# Altium PCB cricket-node-hw__B.PcbDoc (part 3 of 3)
Units mil, origin at the board's own origin, x right, y up, seen from the top; angles counter-clockwise.
Board outline 2830 x 2830 mil, 4 copper layers (Top Layer, GND1, PWR/SIG, Bottom Layer), stack 61.7 mil thick; 153 components, 116 nets, 542 pads, 320 vias.
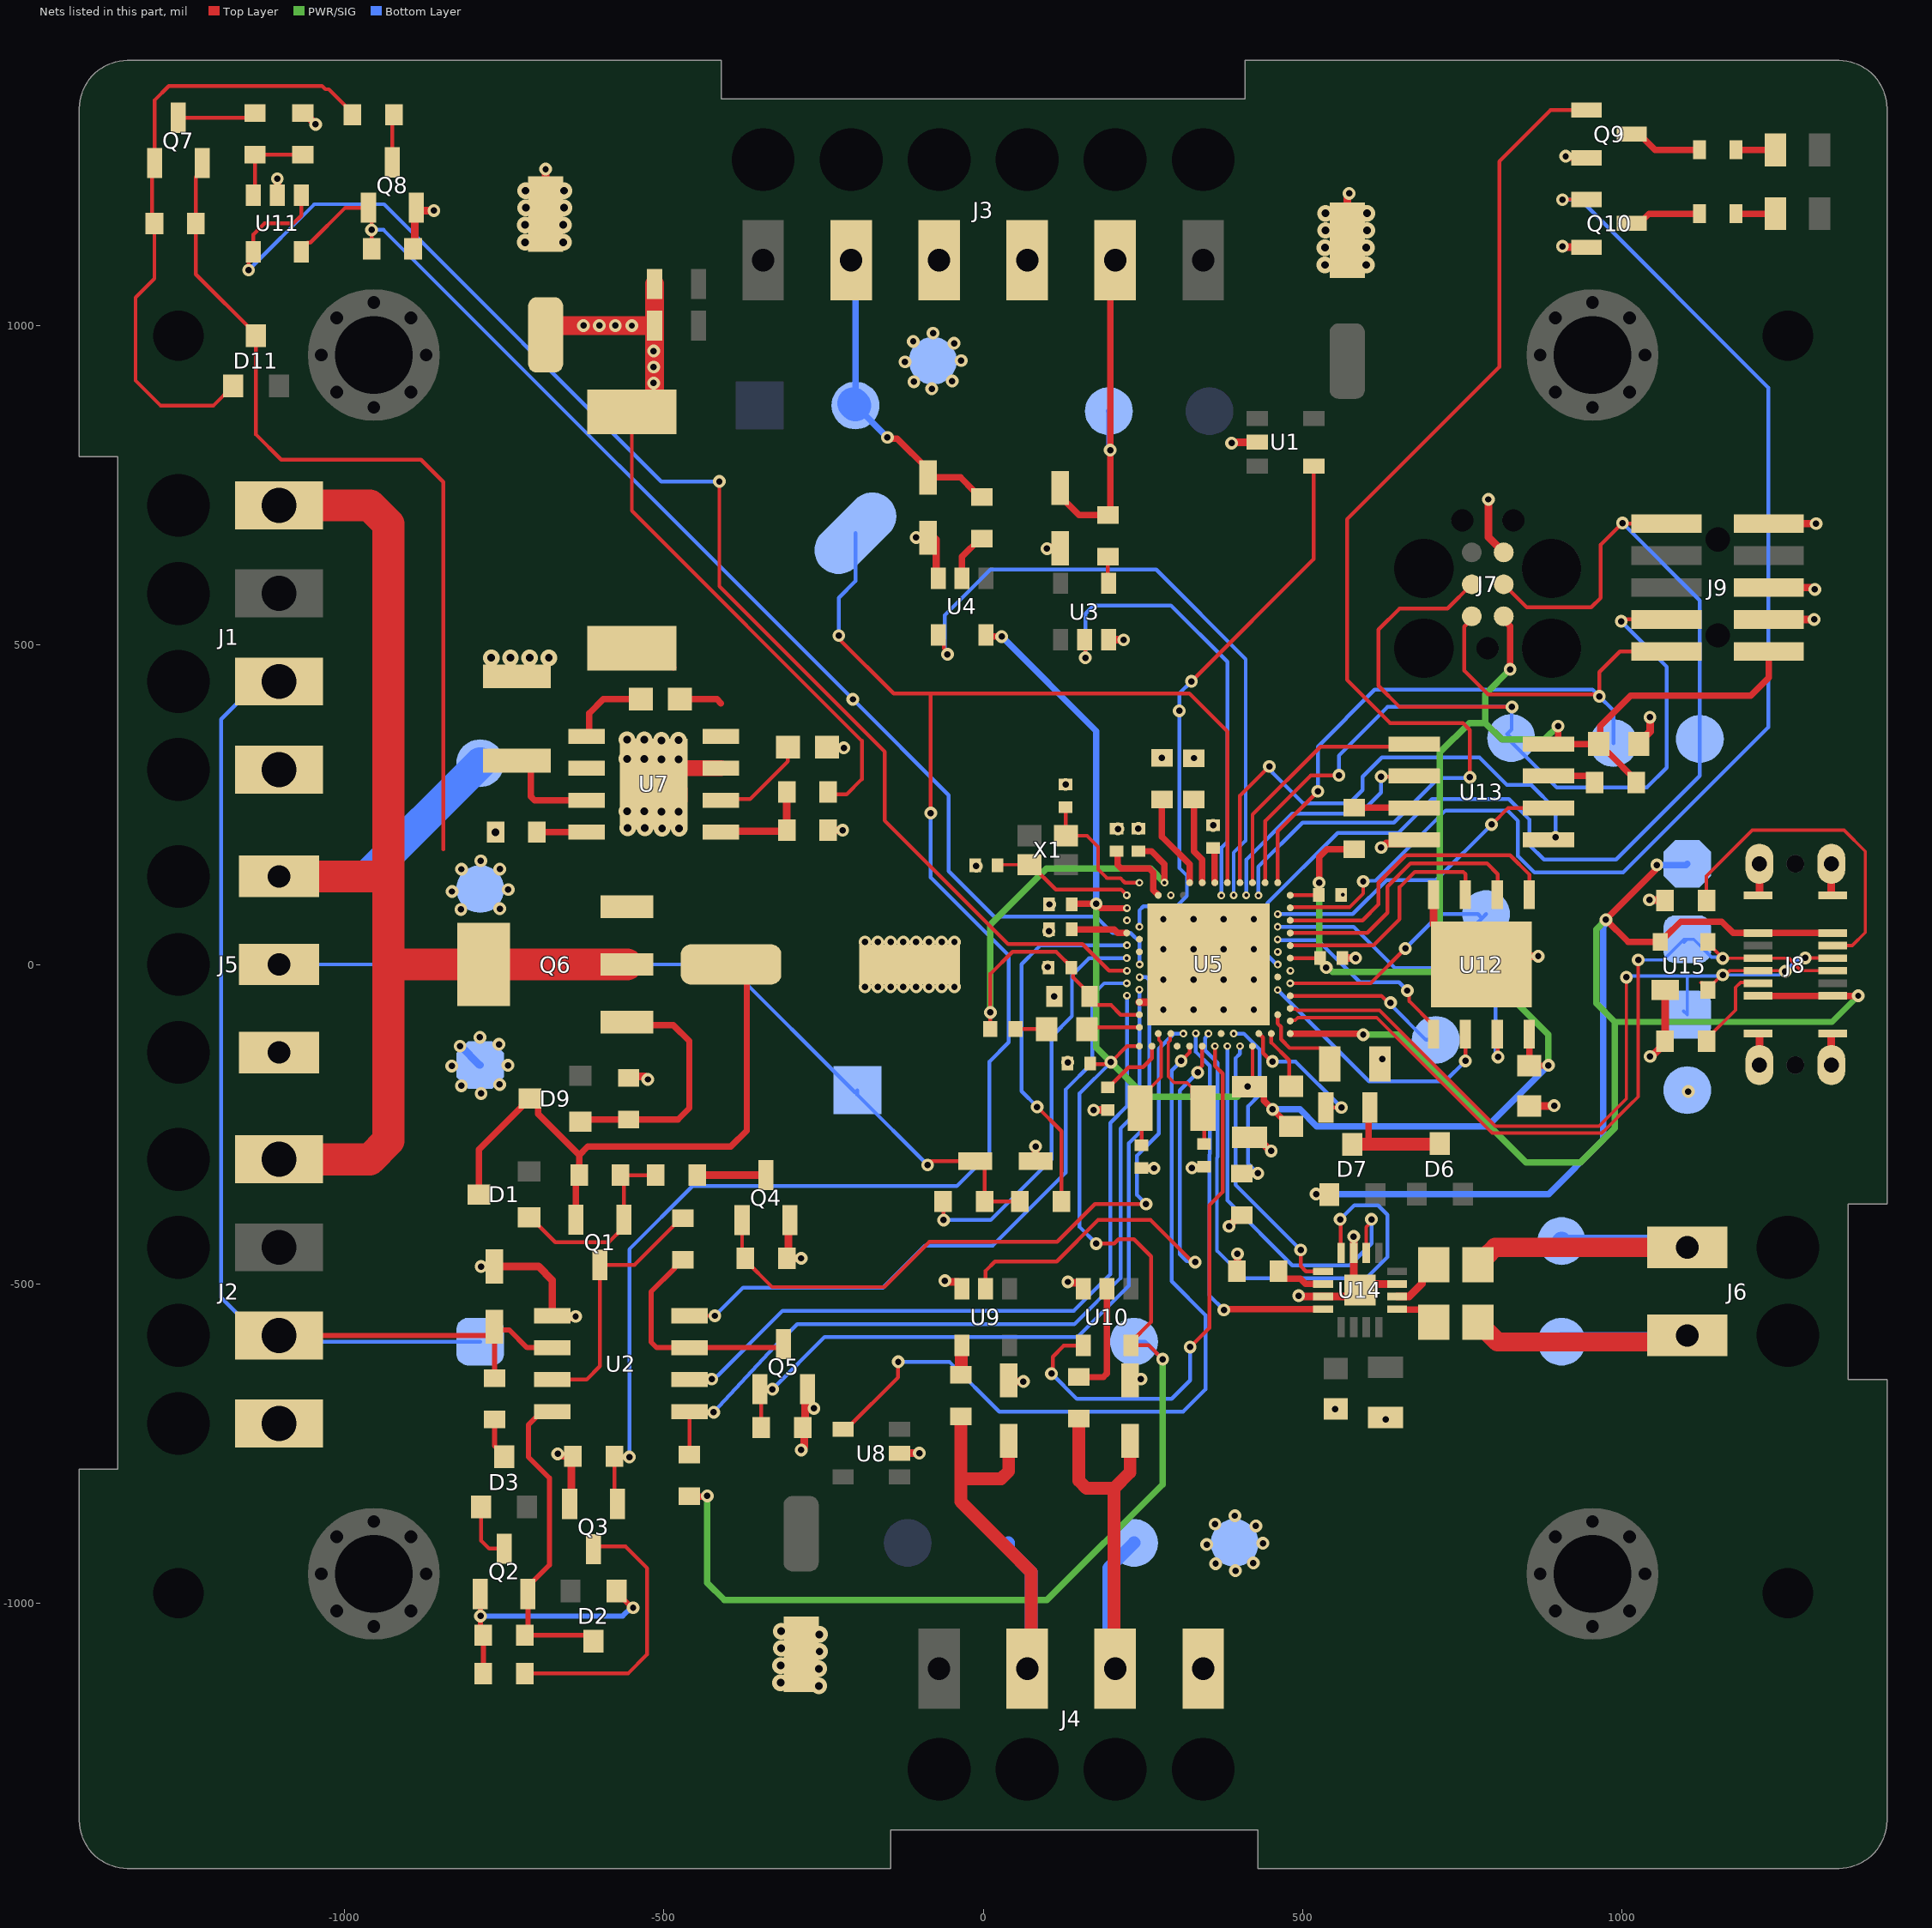
[diagram p4: the nets of this part, all layers, seen from the top]

## Via types
v1: diameter 20, hole 10, Top Layer to Bottom Layer, tented both sides, 208 vias
v2: diameter 26, hole 12, Top Layer to Bottom Layer, tented both sides, 61 vias
v3: diameter 12, hole 6, Top Layer to Bottom Layer, tented both sides, 35 vias
v4: diameter 19.68, hole 9.84, Top Layer to Bottom Layer, tented both sides, 16 vias

## Nets (pads, with @x,y where several pads share a name; then routed paths per layer and width w, separated by ;. In a path a pad name is that pad's centre, name@x,y a point inside that pad or via, vN(x,y) a via of type N, cw(c..) or ccw(c..) an arc to the next point about the centre after c; other vN are vias at no path point) (continued)
+VBUS: D7.1 J8.A4 J8.A9 J8.B4 J8.B9 TP1.1 U5.AD2 U15.4 | length 2923.4
  Top Layer w10: U5.AD2@480.79,-108.27 593.27,-108.27 v1(595,-110) ; v1(521.37,-359.37) 540.98,-359.37 D7.1@541.98,-360.37 ; v1(1054.74,155.74) 1052.83,153.83 1052.83,147.83 v1(975,70) 1010,35 U15.4@1060,35 1060,36.97 1066.81,43.78 1068.78,43.78 1092,67 1156.38,67 1174.17,49.21 J8.A9@1213.19,49.21 J8.B4@1330.12,49.21 ; J8.A4@1213.19,-49.21 J8.B9@1330.12,-49.21 1365.79,-49.21 1366,-49 v1(1370,-49)
  PWR/SIG w10: v1(595,-110) 650,-110 850,-310 935,-310 988.96,-256.04 988.96,-90 ; v1(975,70) 960,55 960,-61.04 988.96,-90 ; v1(1370,-49) 1329,-90 988.96,-90
  Bottom Layer w10: v1(521.37,-359.37) 885.63,-359.37 971,-274 971,59.14 973.09,61.23 973.09,68.09 v1(975,70) ; v1(1054.74,155.74) 1100.62,155.74 TP1.1@1102.36,157.48
+VIN: J1.1 J2.1 J5.1 Q6.2 Q6.4 TP27.1 | length 2242.3
  Top Layer w50: J2.1@-1102.36,-305.12 -960.29,-305.12 -931,-275.83 -931,137 ; J5.1@-1102.36,137.8 -931.8,137.8 -931,137 ; J1.1@-1102.36,718.5 -960.29,718.5 -931,689.21 -931,137 ; -908,0 Q6.4@-782.2,0 Q6.2@-557.8,0
  Bottom Layer w50: J5.1@-1102.36,137.8 -964.57,137.8 TP27.1@-787.4,314.96
+VIN-PROTECT: C7.1 C8.1 D1.3 D9.3 D11.3 Q1.2 Q6.3 Q7.2 R1.2 R24.2 TP5.1 U7.2 U7.3 | length 2515.8
  Top Layer w6: R24.2@-1243.3,1146.27 R24.2@-1232.52,1157.05 ; Q7.2@-1222.6,1254.57 -1222.6,1242.76 -1232.52,1232.83 R24.2@-1232.52,1160 R24.2@-1232.52,1157.05 ; -845,180 -845,755 -880,790 -1099,790 -1138.39,829.39 D11.3@-1138.39,984.25 -1138.39,986.22 -1232.52,1080.35 R24.2@-1232.52,1157.05
  Top Layer w10: D1.3@-789.37,-360 -789.37,-290 -722.09,-222.72 -722.09,-220.75 -711.34,-210 D9.3@-709.37,-210 -707.4,-210 -696.65,-220.75 -696.65,-234.09 -632.48,-298.27 ; C8.1@-730,319.06 -722.05,319.06 -708.35,305.35 -708.35,262.98 -702.49,257.13 U7.3@-621.04,257.13 ; Q1.2@-637.4,-399.57 -637.4,-319.06 R1.2@-632.48,-314.13 ; R1.2@-632.48,-330 R1.2@-632.48,-314.13 ; C7.1@-395,0.24 C7.1@-394.76,0 -370,-24.76 -370,-260 -395,-285 -619.21,-285 -632.48,-298.27 ; R1.2@-632.48,-314.13 -632.48,-298.27
  other v1: -817.61,86.19 -756.61,87.19 -831.61,114.19 -743.61,117.19 -816.81,149.1 -756.61,149.19 -786.61,162.19
AUX1: U5.N1 U10.4 | length 876.9
  Top Layer w6: v1(107,-640.5) 109,-638.5 109,-614 126,-597 155.64,-597 U10.4@156.54,-596.1 ; v1(324,-599) 354,-569 354,-377 375,-356 375,-171 362.68,-158.68 v3(362.68,-127.95)
  Bottom Layer w6: v1(107,-640.5) 146.5,-680 295,-680 324,-651 v1(324,-599)
AUX1-EXT: D13.2 J4.3 R30.2 TP11.1 | length 761.9
  Top Layer w20: R30.2@150,-710.98 150,-808.28 161.72,-820 205,-820 ; J4.3@205,-1122.82 205,-820 ; D13.2@230,-745.75 230,-795 205,-820
  Bottom Layer w20: J4.3@206.69,-1102.36 196.85,-1092.52 196.85,-944.73 236.07,-905.51 TP11.1@236.22,-905.51
BOARD-ID0: R21.2 U5.L24 | length 124.9
  Top Layer w10: R21.2@330,247.52 330,177.04 342.99,164.05 U5.L24@342.99,127.95
BOARD-ID1: R20.2 U5.J24 | length 137.5
  Top Layer w10: R20.2@280,247.52 280,200 323.31,156.69 U5.J24@323.31,127.95
BOARD-ID2: R19.2 U5.T2 | length 283.9
  Top Layer w6: R19.2@405,-327.52 405.52,-327 v1(430,-327)
  Bottom Layer w6: v3(392.2,-108.27) 408.27,-108.27 433,-133 433,-204 415,-222 415,-312 v1(430,-327)
BTN0: U4.4 U5.T23 | length 1039.4
  Top Layer w6: U4.4@-70.42,516.02 -61.6,507.21 -61.6,494.71 -56,489.1 v1(-56,485.31)
  Bottom Layer w6: v1@-60,480 -60,546.67 11.33,618 271,618 411,478 411,194 392.2,175.2 v3(392.2,108.27)
BTN0-EXT: D8.2 J3.5 R12.2 TP7.1 | length 514.4
  Top Layer w10: v1(-150,825) -148.09,823.09 -134.59,823.09 -86.57,775.07 D8.2@-86.57,762.28 ; D8.2@-86.57,749.48 D8.2@-86.57,762.28 ; R12.2@-5.01,731.76 -5.01,732.05 -13.5,740.54 -13.79,740.54 -35.52,762.28 D8.2@-86.57,762.28
  Bottom Layer w10: J3.5@-206.69,1102.36 -200,1095.67 TP7.1@-200,875 v1(-150,825)
  Bottom Layer w50: J3.5@-206.69,1102.36 J3.5@-203.35,1099.02 ; TP7.1@-203.35,878.35 TP7.1@-200,875
CC1: J8.A5 R37.2 | length 141.9
  Top Layer w5.14: R37.2@1132.48,-120 1132.48,-117.05 1178,-71.53 1178,-36 1185.85,-28.15 1211.81,-28.15 J8.A5@1213.19,-29.53
CC2: J8.B5 R36.2 | length 523.7
  Top Layer w5.14: R36.2@1137.48,95 R36.2@1132.48,100 1132.48,138.48 1204,210 1348,210 1380.99,177.01 1380.99,49.99 1360.53,29.53 J8.B5@1330.12,29.53
CHG-DET: R32.1 U5.A16 | length 575.8
  Top Layer w6: v1(84.5,-223) 122.48,-260.98 R32.1@122.48,-371 R32.1@123,-371.52
  Top Layer w10: U5.A16@224.88,29.53 224.88,29.88 v3(225,30)
  Bottom Layer w6: v1(84.5,-223) 60,-198.5 60,0.35 84.5,24.85 87.07,27.43 89.65,30 v3(225,30)
CHG-DET-PWR: R31.2 U5.A14 | length 635.8
  Top Layer w6: R31.2@-62.48,-371 -62,-371.48 v1(-62,-400)
  Bottom Layer w6: v1(-62,-400) 12,-400 107,-305 107,-113 139,-81 139,-17 165.84,9.84 v3(224.88,9.84)
CHG-LOOP: D14.2 J5.2 R31.1 R32.2 TP16.1 | length 1453.4
  Top Layer w6: v1(-87,-314) -87,-311.51 -83.49,-308 D14.2@-12.24,-308 -8.3,-308 2.48,-318.78 R31.1@2.48,-371 R32.2@57.52,-371
  Bottom Layer w6: TP16.1@-200.5,-200.5 -401,0 J5.2@-1072.36,0 ; TP16.1@-196.85,-196.85 -196.85,-204.15 v1(-87,-314) ; J5.2@-1072.36,0 J5.2@-1102.36,0 -1077.36,-25 -1047.36,-25 J5.2@-1072.36,0
FRAM-CLK: U5.AC21 U13.6 | length 493.1
  Top Layer w6: v1(796,219) 822,245 U13.6@885.32,245
  Bottom Layer w5.98: v3(461.1,78.74) 578.72,78.74 631.9,131.92 708.92,131.92 v1(796,219)
FRAM-CS: U5.W24 U13.1 | length 405.4
  Top Layer w6: U5.W24@421.73,127.95 421.73,234.73 528,341 670.69,341 U13.1@674.69,345
FRAM-SDI: U5.U24 U13.5 | length 795.6
  Top Layer w6: U5.U24@402.05,127.95 402.05,264.05 v1(448,310)
  Bottom Layer w6: v1(448,310) 448,306.21 452.94,301.28 452.94,300.06 501,252 573,252 594,273 594,293.87 624.13,324 777,324 820,281 858,281 896,243 v1(896,199)
FRAM-SDO: U5.V23 U13.2 | length 387.4
  Top Layer w6: v1(623,294) 673.69,294 U13.2@674.69,295
  Bottom Layer w6: v3(411.89,108.27) 411.89,163.89 484,236 590,236 623,269 v1(623,294)
GND: C1.1 C2.1 C3.1 C4.1 C6.1 C7.2 C8.2 C9.1 C10.1 C11.1 C12.2 C13.2 C14.2 C15.1 C16.1 C17.1 C18.1 C19.1 C20.1 C21.2 C22.2 C23.1 C24.1 C25.1 C26.1 C27.1 C28.1 D4.1 D5.1 D8.1 D12.1 D13.1 D14.1 J1.4 J2.4 J3.3 J3.4 J4.4 J5.3 J7.5 J8.A1 J8.A12 J8.B1 J8.B12 J8.S1 J8.S2 J8.S3 J8.S4 J9.3 J9.5 J9.9 pad.G1@1259.84,-984.25 pad.G1@-1259.84,-984.25 Q3.2 Q4.2 Q5.2 Q8.2 Q9.2 Q10.2 R5.1 R6.1 R10.1 R18.2 R19.1 R20.1 R21.1 R22.2 R23.2 R28.2 R29.1 R33.2 R36.1 R37.1 TP2.1 TP24.1 TP25.1 TP26.1 U1.2 U2.5 U3.3 U4.3 U5.74 U5.B7 U5.F23 U7.7 U7.9 U8.2 U9.3 U10.3 U11.2 U12.4 U12.9 U13.4 U14.3 U14.11 U14.15 U14.17 U15.1 | length 3596.9
  Top Layer w10: v2(-557.63,239.83) -557.63,240.22 U7.9@-527.63,270.22 ; v2(-557.63,351.83) -557.63,294.33 -542.33,279.02 -542.33,251.52 v2(-530.63,239.83) -530.63,267.22 U7.9@-527.63,270.22 ; v2(-556.63,213.83) U7.9@-556.63,239.83 ; v2(-530.63,321.83) -527.63,318.83 U7.9@-527.63,314.51 ; U7.9@-530.63,323.46 v2(-530.63,351.83) ; U7.9@-527.63,282.13 U7.9@-527.63,270.22 ; U7.9@-515.72,282.13 U7.9@-527.63,270.22 ; v2(-503.63,238.83) U7.9@-503.63,272.17 ; v2(-503.63,320.83) -500.63,317.83 U7.9@-500.63,307.13 ; U7.9@-503.63,322.46 v2(-503.63,350.83) ; U7.9@-477.04,307.13 v2(-477,321) v2(-477,321) ; U7.9@-477,322.63 v2(-477,351)
  Top Layer w12: U11.2@-1105,1204.29 v1(-1105,1230) ; R28.2@-1065,1332.48 -1062.05,1332.48 -1045,1315.43 v1(-1045,1315) ; R29.1@-892.52,1120 -890.06,1122.46 Q8.2@-890.06,1182.11 ; Q8.2@-887.6,1184.57 Q8.2@-890.06,1182.11 ; v1(-860,1180) -887.95,1180 Q8.2@-890.06,1182.11 ; v1(-786,-473) -785.76,-472.76 D4.1@-765,-472.76 -696.24,-472.76 -674.57,-494.43 U2.5@-674.57,-550 -671.57,-553 -640,-553 v1(-638,-551) ; C14.2@-685,1174.49 v1(-685,1245) ; v1(-666,-766) -663,-769 -643.48,-769 R5.1@-642.48,-770 -644.94,-772.46 -644.94,-842.11 Q3.2@-647.4,-844.57 ; R18.2@-555,-177.52 -552.48,-175 -530,-175 v1(-525,-180) ; Q4.2@-302.6,-400.43 -305.06,-402.89 -305.06,-457.54 R6.1@-307.52,-460 v1(-285,-460) ; C13.2@-285,-1080 C13.2@-280,-1085 ; v1(-285,-760) -280,-755 -280,-727.52 R10.1@-282.52,-725 ; R10.1@-278.76,-721.24 -278.76,-695 ; Q5.2@-278.76,-668.76 -278.76,-695 ; Q5.2@-278,-675.48 Q5.2@-273.76,-671.24 ; v1(-265,-695) -278.76,-695 ; R23.2@-240,212.52 R23.2@-242.52,210 v1(-220,210) ; C15.1@-235.94,338 -234.44,339.5 -218.5,339.5 v1(-218,339) ; U8.2@-130.71,-765 v1(-100,-765) ; v1(-105.01,668.31) -104.49,667.79 -76.57,667.79 -73.49,664.71 -73.49,607.68 U4.3@-70.42,604.61 ; v1(-60,-495.13) -57.84,-495.13 -56.18,-496.79 -39.28,-496.79 -33.46,-502.6 U9.3@-33.46,-507.52 ; C21.2@-12.72,155 -12,155 v1(-11,154) ; D12.1@40,-651.26 41.74,-653 v1(63,-653) ; v1(82,-285) 82,-307.76 D14.1@82.24,-308 ; v1(100,651) 102,653 118.94,653 D5.1@120.53,651.41 ; v1(101,-4) 101.28,-4 C10.1@102.28,-5 ; v1(103,52) 103,54.72 C18.1@103.28,55 ; v1(104,94) 104,94.72 C2.1@104.28,95 ; C1.1@132.28,-155 132.5,-154.78 v1(132.5,-153.21) ; v1(132.64,-496.94) 134.17,-498.47 150.72,-498.47 156.54,-504.28 U10.3@156.54,-507.52 ; v1(173,-228) 173.14,-227.86 194.86,-227.86 C17.1@195,-227.72 ; U3.3@196.28,508.14 219.86,508.14 v1(220,508) ; C19.1@209,212.72 209.72,212 v1(211,212) ; D13.1@230,-651.26 232.17,-649.09 v1(247.04,-649.09) ; U5.B7@244.57,-59.06 270.16,-59.06 v4(281.97,-70.87) ; C23.1@248,-318.72 248.14,-318.86 267.36,-318.86 v1(267.5,-319) ; v1(327,-318.47) 327.88,-317.6 345.12,-317.6 C24.1@346,-316.72 ; v1(385,-410) 385,-409.53 402.05,-392.48 R19.1@405,-392.48 ; v1(389,816) 390.4,817.4 U1.2@429,817.4 ; R33.2@397.52,-480 398,-479.52 v1(398,-453) ; C6.1@417,-270.37 427.83,-270.37 449.46,-292 v1(451,-292) ; v1(494,-518.53) 495.47,-520 507,-520 507.06,-519.94 531.83,-519.94 U14.3@531.93,-519.84 580.16,-519.84 U14.17@590,-510 ; v1(551,-696) 551.5,-696 C26.1@552,-695.5 ; C3.1@560.72,109 v3(563,109) ; C4.1@562.72,10 v1(583,10) ; C12.2@570,1133.49 570,1204 v1(573,1207) ; v1(580,-426) 580,-426.77 580.06,-426.83 580.06,-451.83 U14.15@580.16,-451.93 580.16,-500.16 U14.17@590,-510 ; C20.1@621.37,-156 621.37,-151.63 v1(625,-148) ; v1(623,183) 625.16,183 631.35,189.19 668.87,189.19 U13.4@674.69,195 ; v1(630,-712) C27.1@630,-709.37 ; U14.11@648.07,-500.16 599.84,-500.16 U14.17@590,-510 ; U12.4@705,109.06 705,63.19 768.19,0 U12.9@780,0 793,13 v1(869,13) ; v1(791,728) 791,669 J7.5@815,645 ; C25.1@855,-221.5 893.5,-221.5 v1(894,-221) ; v1(907,1124) 908.4,1122.6 Q10.2@944.57,1122.6 ; v1(912,1265) 913,1265 914,1264 943.17,1264 Q9.2@944.57,1262.6 ; C28.1@1026.5,345 1026.5,346.97 1044,364.47 v1(1044,387) ; v1(1043,101) 1066.52,101 R36.1@1067.52,100 ; v1(1044.14,-144) 1046.47,-144 1067.52,-122.95 R37.1@1067.52,-120 1067.52,-40.16 U15.1@1067.87,-39.8 ; J8.A1@1213.19,-108.27 1215.26,-108.27 1215.35,-108.36 J8.S1@1215.35,-157.48 ; J8.A12@1213.19,108.27 1215.26,108.27 1215.35,108.36 J8.S2@1215.35,157.48 ; J9.3@1230,540 v1(1301,540) ; J9.5@1230,590 1299,590 v1(1302,587) ; J9.9@1230,690 v1(1304,690) ; J8.S3@1327.95,-157.48 1327.95,-108.36 1328.05,-108.27 J8.B12@1330.12,-108.27 ; J8.S4@1327.95,157.48 1327.95,108.36 1328.05,108.27 J8.B1@1330.12,108.27
  Top Layer w25: U7.9@-515.72,314.51 U7.9@-515.72,282.13 ; v2(-503.63,238.83) -485.8,256.65 U7.9@-475.8,256.65 ; U7.9@-501.52,294.25 U7.9@-495.84,286.16 ; U7.9@-488.14,275.17 -482.14,281.16 -475.41,274.43 -475.41,257.05 U7.9@-475.8,256.65 ; U7.9@-488.14,282.13 U7.9@-515.72,282.13 ; U7.9@-488.14,291.99 U7.9@-475.07,305.06 ; v2(-477,239) -475.8,240.2 U7.9@-475.8,256.65 ; U7.7@-410.41,307.13 -490.72,307.13 U7.9@-515.72,282.13
  Bottom Layer w12: v1(-819,-128) -817.94,-128 -788.46,-157.48 TP2.1@-787.4,-157.48 ; TP24.1@1102.36,-196.85 1104,-198.49 v1(1104,-199)
  other v1: 395,-949 364,-938 423,-937 350,-908 438,-906 427,-879 363,-876 394,-863 -786,-202 -817,-190 -757,-188 -832,-159 -744,-158 -758,-125 -788,-114 111.44,-50 -185,-35 -165,-35 -145,-35 -125,-35 -105,-35 -85,-35 -65,-35 -45,-35 -185,35 -165,35 -145,35 -125,35 -105,35 -85,35 -65,35 -45,35 243,212.72 360,217.72 129,281.72 280,323.48 330,323 -80.48,901.18 -108.48,912.18 -48.48,913.18 -122.48,943.18 -34.48,945.18 -45.48,972.18 -109.48,975.18 -78.48,988.18
  other v2: -257.18,-1129.48 -317.18,-1124.48 -257.18,-1102.48 -317.18,-1097.48 -256.18,-1075.48 -316.18,-1070.48 -256.35,-1048.85 -316.35,-1043.85 -763.52,207.13 -502.63,212.83 -476,213 -529.63,213.83 -557.63,321.83 -770,480 -740,480 -710,480 -680,480 535,1095 600,1095 535,1122 600,1122 -717.18,1130.52 -657.18,1130.52 536,1149 601,1149 -717.18,1157.52 -657.18,1157.52 535.83,1175.63 600.83,1175.63 -716.18,1184.52 -656.18,1184.52 -716.35,1211.15 -656.35,1211.15
  other v3: 293.78,108.27
  other v4: 329.21,-70.87 376.46,-70.87 423.7,-70.87 281.97,-23.62 329.21,-23.62 376.46,-23.62 423.7,-23.62 281.97,23.62 329.21,23.62 376.46,23.62 423.7,23.62 281.97,70.87 329.21,70.87 376.46,70.87 423.7,70.87
GREEN-LED: Q10.1 U5.AD22 | length 2002.5
  Top Layer w6: U5.AD22@480.79,88.58 481.57,89.37 573.5,89.37 595,110.87 v1(595,130) ; v1(907,1197) 911,1197 911.4,1197.4 Q10.1@944.57,1197.4
  Bottom Layer w6: v1(595,130) 595.98,130.98 614,130.98 724.02,241 821,241 837.35,224.65 837.35,169.65 863,144 1002,144 1229,371 1229,903 935,1197 v1(907,1197)
LIN-CMDR: Q3.1 R5.2 TP9.1 U5.R24 | length 2917.2
  Top Layer w6: Q3.1@-572.6,-844.57 -577.52,-839.65 R5.2@-577.52,-770 -555,-770 v1(-554,-771) ; v1@-225,513.71 v1(-226,514.71) -226,509.79 -140.21,424 -82,424 ; v1(-82,237) -82,424 ; U5.R24@382.36,127.95 382.36,364.64 323,424 -82,424
  Bottom Layer w6: v1(-554,-771) -554,-446 -455,-347 -41,-347 10,-296 10,-152 40,-122 40,14 -82,136 v1(-82,237) ; v1(-226,514.71) -226,574 -200,600 TP9.1@-200,675
LIN-IO: D4.2 J1.3 J2.3 R7.2 TP13.1 U2.6 | length 1980.2
  Top Layer w8: J2.3@-1102.36,-580.71 -774.78,-580.71 D4.2@-765,-570.93 ; R7.2@-765,-647.52 D4.2@-765,-570.93 ; U2.6@-674.57,-600 -714,-600 -742,-572 -760.24,-572 D4.2@-765,-567.24 D4.2@-765,-570.93
  Bottom Layer w6: J1.3@-1102.36,442.91 -1133.76,442.91 -1193,383.67 -1193,-521.47 -1133.76,-580.71 J2.3@-1102.36,-580.71 -1092.52,-590.55 TP13.1@-787.4,-590.55
LIN-PWR: Q4.1 R6.2 U5.H2 | length 1074.5
  Top Layer w6: Q4.1@-377.4,-400.43 -377.4,-455.08 R6.2@-372.48,-460 -372.48,-462.95 -330.43,-505 -155,-505 -84,-434 116,-434 175,-375 v1(255,-375)
  Bottom Layer w6: v1(255,-375) 241,-361 241,-299 275,-265 275,-131.97 298.71,-108.27 v3(313.46,-108.27)
LIN-RX-OUT: R11.2 U2.1 U5.B9 | length 1296
  Top Layer w6: R11.2@-460,-767.52 U2.1@-460,-700 -459,-701 v1(-422,-701)
  Bottom Layer w6: v1(-422,-701) -327.38,-599.06 -323.78,-595.45 -320.85,-592.52 -291.33,-563 143,-563 215,-491 215,-257 244.57,-227.43 v3(244.57,-39.37)
LIN-SLP-N: U2.2 U5.A8 | length 1174.4
  Top Layer w6: U2.2@-460,-650 -459,-649 v1(-425,-649) ; U5.A8@224.88,-49.21 225,-49.09 v3(225,-49)
  Bottom Layer w6: v1(-425,-649) -421.21,-649 -415.78,-643.57 -415.57,-643.57 -314,-542 142,-542 199,-485 199,-248 225,-222 v3(225,-49)
LIN-TX-IN: U2.4 U5.A10 | length 1038.7
  Top Layer w6: U2.4@-460,-550 v1(-420,-550)
  Bottom Layer w6: v1(-420,-550) -376,-506 -157,-506 -91,-440 15,-440 129,-326 129,-196 171,-154 171,-48 189.47,-29.53 v3(224.88,-29.53)
LIN-WAKE: Q5.1 R10.2 U5.B11 | length 1215
  Top Layer w6: R10.2@-347.48,-725 -347.48,-667.32 Q5.1@-349.8,-665 v1(-330,-665) ; U5.B11@244.57,-19.69 244.68,-19.69 v3(245,-20)
  Bottom Layer w6: v1(-330,-665) -248,-583 148,-583 228,-503 228,-280 260,-248 260,-24.51 255.49,-20 v3(245,-20)
NetC5_1: C5.1 L4.1 U7.8 | length 151.8
  Top Layer w10: L4.1@-550,494.96 -514.96,494.96 L4.1@-484.92,464.92 ; C5.1@-475.02,415.13 -416.77,415.13 -410.41,408.77
  Top Layer w25: L4.1@-550,494.96 L4.1@-545.04,490
NetC5_2: C5.2 U7.1 | length 127.7
  Top Layer w10: U7.1@-621.04,357.13 -617.09,361.08 -617.09,392.91 -594.87,415.13 C5.2@-536.04,415.13
NetC9_2: C9.2 C10.2 C11.2 L2.1 U5.B5 U5.E24 | length 925.5
  Top Layer w6: L2.1@11.34,-101.18 v1(11.34,-75) 11.34,-14.66 46,20 114.29,20 140.7,-6.41 140.7,-20.2 162.56,-42.06 162.56,-53.94 172.35,-63.73 200.3,-63.73 215.31,-78.74 U5.B5@244.57,-78.74
  Top Layer w10: C9.2@243,177.28 263.72,177.28 283.94,157.06 283.94,128.06 v3(284,128) v3(284,128)
  PWR/SIG w10: v1(11.34,-75) 11.34,62.34 98.96,149.96 262.04,149.96 v3(284,128)
  Bottom Layer w6: v3@282.85,129.15 v3(284,128)
NetC14_1: C14.1 L4.2 R15.1 R16.1 R17.2 | length 1189.7
  Top Layer w6: L4.2@-550,865.04 -550,710 -190,350 -190,290 -214,266 -238.52,266 R17.2@-242.52,270
  Top Layer w30: C14.1@-685,985.51 -685,987.44 -672.44,1000 v1(-550,1000) R15.1@-514.45,1000 ; L4.2@-550,865.04 -534.49,865.04 -514.45,885.08 R15.1@-514.45,1000 ; R16.1@-514.45,1065 R15.1@-514.45,1000
  other v1: -515.83,910.11 -515.83,935.11 -515.83,960.11 -625.83,1000.11 -600.83,1000.11 -575.83,1000.11
NetC15_2: C15.2 U7.6 | length 152.1
  Top Layer w6: U7.6@-410.41,257.13 -408.92,258.62 -364.86,258.62 -305.77,317.71 -305.77,339.74 C15.2@-305.51,340
NetC16_2: C16.2 U5.N24 | length 55.4
  Top Layer w10: C16.2@360,182.28 362.52,179.76 362.52,128.11 U5.N24@362.68,127.95
NetC17_2: C17.2 U5.C1 | length 106.9
  Top Layer w6: C17.2@195,-192.28 196.57,-192.28 227.86,-161 250,-161 264.25,-146.75 U5.C1@264.25,-127.95
NetC18_2: C18.2 U5.A18 | length 88.6
  Top Layer w10: C18.2@138.72,55 205,55 210.63,49.37 224.72,49.37 U5.A18@224.88,49.21
NetC19_2: C19.2 U5.D23 | length 121.6
  Top Layer w10: C19.2@209,177.28 210.57,175.71 210.57,155.82 216.43,149.96 260.14,149.96 266,144.1 266,116.59 274.09,108.49 U5.D23@274.09,108.27
NetC20_2: C20.2 U5.AC5 | length 139.4
  Top Layer w6: U5.AC5@461.1,-78.74 461.1,-92.62 466.37,-97.89 466.37,-117.37 479.94,-130.94 528.4,-130.94 542.63,-145.17 C20.2@542.63,-156
NetC21_1: C21.1 U5.A23 X1.3 | length 222.5
  Top Layer w5: C21.1@22.72,155 23.9,156.18 X1.3@72.48,156.18
  Top Layer w6: X1.3@72.48,156.18 74.45,156.18 113.63,117 216.15,117 v3(224.88,108.27)
NetC22_1: C22.1 U5.B24 X1.1 | length 211
  Top Layer w6: C22.1@129,246.28 129.57,245.72 X1.1@129.57,201.46 162.54,201.46 180,184 180,149 194,135 214.97,135 222.02,127.95 v3(244.57,127.95)
NetD1_1: D1.1 Q1.1 R1.1 R4.1 | length 312.4
  Top Layer w6: D1.1@-710.63,-396.02 -708.66,-396.02 -669.69,-435 -586.22,-435 -562.6,-411.38 -562.6,-334.92 R1.1@-567.52,-330 R4.1@-512.48,-330
NetD2_1: D2.1 Q2.1 R2.1 R3.1 | length 409
  Top Layer w8: Q2.1@-787.4,-985.43 -787.2,-985.63 -787.2,-1019.8 v1(-787,-1020) -787,-1045.48 R2.1@-782.48,-1050 R3.1@-782.48,-1110 ; D2.1@-573.98,-980.63 -573.98,-982.6 -549.57,-1007 v1(-548,-1007)
  Bottom Layer w8: v1(-787,-1020) -564.25,-1020 -551.25,-1007 v1(-548,-1007)
NetD2_3: D2.3 Q2.2 R2.2 U2.8 | length 516.3
  Top Layer w8: U2.8@-674.57,-700 -691.3,-700 -712,-720.7 -712,-771 -679,-804 -679,-940.02 -712.6,-973.62 Q2.2@-712.6,-985.43 -712.6,-1045.08 R2.2@-717.52,-1050 -619.37,-1050 D2.3@-610,-1059.37
NetD3_1: D3.1 Q2.3 | length 93.8
  Top Layer w6: D3.1@-786.02,-849.37 -786.02,-901.98 -773.43,-914.57 Q2.3@-750,-914.57
NetD3_3: D3.3 R7.1 | length 64.4
  Top Layer w8: R7.1@-765,-712.48 -765,-753.66 -750,-768.66 D3.3@-750,-770.63
NetD6_3: D6.3 D7.3 R13.2 | length 216.4
  Top Layer w10: D7.3@578,-281.63 579.97,-279.66 603.48,-279.66 R13.2@603.48,-227
  Top Layer w20: D7.3@578,-281.63 578.5,-281.13 603.48,-281.13 714.5,-281.13 D6.3@715,-280.63
NetD9_1: D9.1 Q6.1 R18.1 | length 394.3
  Top Layer w10: D9.1@-630.63,-246.02 -627.09,-242.48 R18.1@-555,-242.48 -477.48,-242.48 -460,-225 -460,-120 -485,-95 -553.35,-95 Q6.1@-557.8,-90.55
NetD11_1: D11.1 Q7.1 R24.1 R25.1 | length 973.3
  Top Layer w6: R24.1@-1301.02,1160 -1301.02,1250.94 Q7.1@-1297.4,1254.57 -1297.4,1352.6 -1275,1375 -1035,1375 -1030,1370 -1024.53,1370 -987.48,1332.95 R25.1@-987.48,1330 ; R24.1@-1297.48,1160 -1297.48,1073.52 -1327,1044 -1327,914 -1288,875 -1204.92,875 D11.1@-1174.41,905.51
NetD15_C: D15.C R34.2 | length 62
  Top Layer w10: R34.2@1178.54,1275 D15.C@1240.55,1275
NetD16_C: D16.C R35.2 | length 62
  Top Layer w10: R35.2@1178.54,1175 D16.C@1240.55,1175
NetL1_2: L1.2 U5.AB2 | length 94.7
  Top Layer w6: U5.AB2@451.26,-108.27 451.26,-122.26 479,-150 L1.2@479,-191.5
NetL2_2: L2.2 L3.1 | length 48.8
  Top Layer w6: L2.2@50.71,-101.18 L3.1@99.53,-101.18
NetL3_2: L3.2 U5.B3 | length 83.2
  Top Layer w6: L3.2@162.52,-101.18 165.28,-98.43 U5.B3@244.57,-98.43
NetL5_1: L5.1 U14.10 | length 84.7
  Top Layer w12: U14.10@648.07,-519.84 648.17,-519.75 667.1,-519.75 686.94,-499.91 686.94,-488.61 L5.1@705.55,-470
NetL6_1: L6.1 U14.9 | length 66.2
  Top Layer w10: U14.9@648.07,-539.53 648.54,-540 685.94,-540 705.55,-559.61 L6.1@705.55,-560
NetQ1_3: Q1.3 R8.1 U2.7 | length 402
  Top Layer w6: U2.7@-674.57,-650 -621,-650 -600,-629 Q1.3@-600,-470.43 -545.87,-470.43 -472.95,-397.52 R8.1@-470,-397.52
NetQ3_3: Q3.3 R3.2 | length 438.9
  Top Layer w6: R3.2@-717.52,-1110 -556,-1110 -526,-1080 -526,-945 -560,-911 -605.57,-911 Q3.3@-610,-915.43
NetQ4_3: Q4.3 R4.2 | length 107.7
  Top Layer w12: R4.2@-447.52,-330 -340.43,-330 Q4.3@-340,-329.57
NetQ5_3: Q5.3 R8.2 U2.3 | length 364.7
  Top Layer w8: R8.2@-470,-462.48 -472.95,-462.48 -482.73,-472.26 -482.73,-475.21 -520,-512.48 -520,-591 -511,-600 U2.3@-460,-600 -318.27,-600 Q5.3@-312.4,-594.13
NetQ7_3: Q7.3 R26.2 | length 122.9
  Top Layer w6: Q7.3@-1260,1325.43 -1147.05,1325.43 R26.2@-1140,1332.48
NetQ8_3: Q8.3 R25.2 | length 75.6
  Top Layer w6: Q8.3@-925,1255.43 -925,1327.52 R25.2@-922.52,1330
NetQ9_3: Q9.3 R34.1 | length 116.4
  Top Layer w10: Q9.3@1015.43,1300 1027.24,1300 1052.24,1275 R34.1@1121.46,1275
NetQ10_3: Q10.3 R35.1 | length 112.2
  Top Layer w10: Q10.3@1015.43,1160 1027.24,1160 1042.24,1175 R35.1@1121.46,1175
NetR9_1: R9.1 U3.4 | length 42.3
  Top Layer w6: R9.1@195.33,638.61 195.33,597.67 U3.4@196.28,596.72
NetR12_1: R12.1 U4.2 | length 76.9
  Top Layer w10: U4.2@-33.01,604.61 -33.01,638.51 -4.72,666.8 R12.1@-1.77,666.8
NetR13_1: R13.1 U5.Y2 | length 216.9
  Top Layer w6: U5.Y2@431.57,-108.27 438,-114.69 438,-138.72 451.28,-152 v1(453,-152) ; R13.1@538.52,-226.95 538.52,-224 v1(561,-224)
  Bottom Layer w6: v1(453,-152) 489,-152 v1(561,-224)
NetR14_1: R14.1 U13.3 | length 93.9
  Top Layer w10: R14.1@581,245.48 581.24,245.24 674.45,245.24 U13.3@674.69,245
NetR17_1: R17.1 R23.1 U7.5 | length 166.9
  Top Layer w12: U7.5@-408.43,209.1 U7.5@-410.41,207.13 -408.97,208.56 -308.92,208.56 R23.1@-307.48,210 R17.1@-307.48,270
NetR22_1: R22.1 U7.4 | length 77.5
  Top Layer w10: R22.1@-698.56,207.13 U7.4@-621.04,207.13
NetR26_1: R26.1 R28.1 U11.3 | length 139.2
  Top Layer w6: U11.3@-1142.4,1204.29 -1140,1206.69 R26.1@-1140,1267.52 R28.1@-1065,1267.52
NetR27_1: R27.1 U9.4 | length 47.1
  Top Layer w20: R27.1@-35,-642.52 -34.23,-641.75 -34.23,-596.87 U9.4@-33.46,-596.1
NetR30_1: R30.1 U10.2 | length 179
  Top Layer w10: R30.1@150,-646.02 188.08,-646.02 193.94,-640.17 U10.2@193.94,-507.52
NetR33_1: R33.1 U14.2 | length 79.5
  Top Layer w10: R33.1@462.48,-480 462.48,-482.95 471.26,-491.73 496.43,-491.73 504.86,-500.16 U14.2@531.93,-500.16
NetR38_1: R38.1 U13.7 | length 77.1
  Top Layer w10: U13.7@885.32,295 948.74,295 957.52,286.22 R38.1@957.52,285
NP0: U3.2 U5.P23 | length 732.1
  Top Layer w6: U3.2@158.87,508.14 160,507.02 v1(160,480) ; U5.P23@372.52,108.27 372.73,108.27 v3(373,108)
  Bottom Layer w6: v1(160,480) 160,549 173,562 294,562 382.36,473.64 382.36,192.16 373,182.8 v3(373,108)
NP0-EN: U1.4 U5.B19 | length 874.4
  Top Layer w6: v1(326,443) 517.58,634.58 U1.4@517.58,780
  Bottom Layer w6: v3(244.57,59.06) 244.57,84.57 251,91 303,91 319,107 319,139 307,151 v1(307,397) 307,424 v1(326,443)
NP0-EXT: D5.2 J3.2 R9.2 TP6.1 | length 565.4
  Top Layer w10: D5.2@120.53,745.9 120.53,733.1 150.06,703.57 R9.2@195.33,703.57 199,707.24 v1(199,805) 199,1094.67 J3.2@206.69,1102.36
  Bottom Layer w10: TP6.1@196.85,866.14 197.93,865.07 197.93,806.07 v1(199,805)
NP1: U5.L1 U9.2 | length 785.9
  Top Layer w6: U9.2@3.94,-507.52 3.94,-479.49 18.43,-465 115,-465 180,-400 261.94,-400 327.94,-466 v1(332,-466) ; v1(336,-169) 336,-165.48 342.99,-158.49 U5.L1@342.99,-127.95
  Bottom Layer w6: v1(332,-466) 330.63,-464.63 318.63,-464.63 308,-454 308,-197 v1(336,-169)
NP1-EN: U5.J1 U8.4 | length 1242.8
  Top Layer w6: U8.4@-219.29,-727.6 -214.37,-727.6 -133,-646.23 v1(-133,-622) ; v1(310,-151) 323.31,-137.69 U5.J1@323.31,-127.95
  Bottom Layer w6: v1(-133,-622) -53,-622 25,-700 313,-700 348,-665 348,-549 295,-496 295,-166.11 310,-151.11 v1(310,-151)
NP1-EXT: D12.2 J4.2 R27.2 TP10.1 | length 800.9
  Top Layer w20: R27.2@-35,-707.48 -35,-755 -35,-805 ; D12.2@40,-745.75 40,-793.28 28.28,-805 -35,-805 ; J4.2@75,-1121.3 75,-951 -35,-841 -35,-805
  Bottom Layer w20: TP10.1@39.37,-905.51 39.37,-915.2 75,-950.83 75,-1096.26 J4.2@68.9,-1102.36
P0.00: C23.2 U5.D2 X2.2 | length 191.5
  Top Layer w5: X2.2@245.79,-209.25 278.71,-176.33 278.71,-122.03 275.02,-118.34 U5.D2@275.02,-109.19
  Top Layer w6: X2.2@245.79,-209.25 X2.2@245.79,-225 248,-227.21 C23.2@248,-283.28 ; U5.D2@274.09,-108.27 U5.D2@275.02,-109.19
P0.01: C24.2 U5.F2 X2.1 | length 210.8
  Top Layer w5: U5.F2@292.86,-109.19 292.66,-109.38 292.66,-119.23 289.71,-122.19 289.71,-175.71 299,-185 319,-185 326.07,-192.07 327.03,-192.07 327.03,-207.81 X2.1@344.21,-225
  Top Layer w6: U5.F2@292.86,-109.19 U5.F2@293.78,-108.27 U5.F2@294.16,-108.65 ; X2.1@344.21,-225 346,-226.79 C24.2@346,-281.28
P0.02: U5.A12 U11.1 U11.4 | length 2252
  Top Layer w6: v1(-1150,1087) -1150,1108.11 U11.4@-1142.4,1115.71 -1142.4,1142.6 -1125,1160 -1080,1160 -1067.6,1172.4 U11.1@-1067.6,1204.29 ; v1(-413,756) -413,592 -154,333 -154,225 39,32 155.32,32 197.17,-9.84 224.84,-9.84 v3(225,-10) ; U5.A12@224.88,-9.84 v3(225,-10)
  Bottom Layer w6: v1(-1150,1087) -1047,1190 -938,1190 -504,756 v1(-413,756)
P0.03: Q8.1 R29.2 U5.B13 U11.5 | length 1972.6
  Top Layer w6: U11.5@-1067.6,1115.71 -1067.6,1120.63 -1058.29,1129.94 -1053.37,1129.94 -998.74,1184.57 Q8.1@-962.4,1184.57 -957.48,1179.65 v1(-957.48,1149.82) R29.2@-957.48,1120
  Top Layer w10: U5.B13@244.57,0 v3(245,0)
  Bottom Layer w6: v1(-957.48,1149.82) -938.82,1149.82 v1(-204,415) -54,265 -54,146 17,75 176.49,75 202.2,49.29 230.71,49.29 245,35 v3(245,0)
P0.05: U5.K2 U14.4 | length 607.9
  Top Layer w6: v3(333,-108) 333.15,-108.15 U5.K2@333.15,-108.27
  Top Layer w10: v1(377,-541) 378.47,-539.53 U14.4@531.93,-539.53
  Bottom Layer w6: v3(333,-108) 333,-137 355,-159 355,-296.53 354,-297.53 354,-518 v1(377,-541)
P0.07: U5.M2 U14.16 | length 857.6
  Top Layer w6: v1(559,-399) 559.74,-399.74 559.74,-451.19 U14.16@560.47,-451.93
  Bottom Layer w6: v3(352.83,-108.27) 352.83,-109.89 347.68,-115.05 347.68,-134.68 367,-154 367,-301.5 366,-302.5 366,-448 409,-491 600,-491 633,-458 633,-392 618,-377 581,-377 v1(559,-399)
P0.12: U5.U1 U14.1 | length 427.6
  Top Layer w6: v1(497,-447) 497,-471.94 505.53,-480.47 U14.1@531.93,-480.47
  Bottom Layer w6: v3(402.05,-127.95) 402.05,-139.95 395,-147 395,-345 v1(497,-447)
P0.13: TP19.1 U5.AD8 | length 258.2
  Top Layer w6: U5.AD8@480.79,-49.21 623.86,-49.21 634.55,-59.9 v1(637.92,-59.9)
  Bottom Layer w6: v1(637.92,-59.9) 637.92,-62.92 693.11,-118.11 TP19.1@708.66,-118.11
P0.14: U5.AC9 U12.6 | length 409.1
  Top Layer w6: v3(461,-40) 461,-39.47 U5.AC9@461.1,-39.37 ; v1(755,-151) U12.6@755,-109.06
  Bottom Layer w6: v3(461,-40) 604,-183 723,-183 v1(755,-151)
P0.15: TP20.1 U5.AD10 | length 367.5
  Top Layer w6: v3(480.79,-29.53) 606.47,-29.53 v1(661,25)
  Bottom Layer w6: v1@662.15,26.15 v1(661,25) 714.74,78.74 774.55,78.74 TP20.1@780.98,72.31 ; TP20.1@774.55,65.89 TP20.1@780.98,72.31 ; TP20.1@787.4,78.74 TP20.1@780.98,72.31
P0.16: U5.AC11 | length 0.4
  Top Layer w6: U5.AC11@461,-20 461,-19.79 U5.AC11@461.1,-19.69
P0.17: U5.AD12 | length 0.3
  Top Layer w6: U5.AD12@480.79,-9.84 480.94,-10 v3(481,-10)
P0.19: U5.AC15 | length 0.4
  Top Layer w6: U5.AC15@461,20 461.1,19.9 v3(461.1,19.69)
P0.20: U5.AD16 U12.3 | length 385.2
  Top Layer w6: U5.AD16@480.79,29.53 480.89,29.63 610.63,29.63 652,71 652,121 676,145 751.49,145 755,141.49 U12.3@755,109.06
P0.21: U5.AC17 U12.5 | length 321.6
  Top Layer w6: v3(461,39) 461.1,39.1 U5.AC17@461.1,39.37 ; v1(664,-41) 666.87,-43.87 666.87,-57.15 705,-95.28 U12.5@705,-109.06
  Bottom Layer w6: v3(461,39) 462.34,37.66 524.34,37.66 590,-28 651,-28 v1(664,-41)
P0.22: U5.AD18 U12.2 | length 433.5
  Top Layer w6: U5.AD18@480.79,49.21 601.21,49.21 633,81 633,122 669,158 789,158 805.74,141.26 805.74,109.79 U12.2@805,109.06
P0.23: U5.AC19 U12.7 | length 519.6
  Top Layer w6: v3(461,59) U5.AC19@461.1,59.06 ; U12.7@805,-109.06 805.5,-109.56 805.5,-144.5 v1(806,-145)
  Bottom Layer w6: v3(461,59) 580,59 645,-6 758,-6 802,-50 802,-141.49 805.51,-145 v1(806,-145)
P0.24: U5.AD20 U12.1 | length 480.8
  Top Layer w6: U5.AD20@480.79,68.9 593.9,68.9 619,94 619,128 662,171 825,171 855,141 U12.1@855,109.06
P0.26: U5.G1
P1.01: Q9.1 U5.Y23 | length 1813.1
  Top Layer w5.98: v1(762,293) 762,367 751,378 637,378 569.58,445.42 569.58,696.58 808,935 808,1257 888.4,1337.4 Q9.1@944.57,1337.4
  Bottom Layer w5.98: v1@760.81,291.81 v1(762,293)
  Bottom Layer w6: v3(431,108) 431,153 500,222 643,222 712.81,291.81 v1@760.81,291.81
P1.08: U5.P2
P1.09: U5.R1 U14.14 | length 617.7
  Top Layer w6: U14.14@599.84,-451.93 599.7,-451.78 599.7,-411.09 608,-402.79 v1(608,-399)
  Bottom Layer w6: v3(382.36,-127.95) 382.36,-369.36 484,-471 574,-471 608,-437 v1(608,-399)
P1.10: U5.A20 | length 0.2
  Top Layer w10: U5.A20@224.88,68.9 v3(225,69)
P1.12: U5.B17
P1.14: U5.B15
RESET: J7.3 J9.10 TP23.1 U5.AC13 | length 1785.1
  Top Layer w6: U5.AC13@461,0 U5.AC13@461.1,0 ; J7.3@815,595 851,559 952,559 967,574 967,657 v1(1001,691) 1002,690 J9.10@1070,690
  Bottom Layer w6: v3(461.1,-0.26) 459.84,-0.26 445,14.57 445,96 555,206 650,206 703,259 823,259 855,227 855,187 878,164 991,164 1122,295 1122,570 v1(1001,691)
SP+: J6.2 L5.2 TP14.1 | length 541.8
  Top Layer w30: L5.2@774.45,-470 774.45,-467.05 784.06,-457.44 787.01,-457.44 801.54,-442.91 J6.2@1102.36,-442.91
  Bottom Layer w30: TP14.1@905.51,-433.07 910.43,-437.99 1097.44,-437.99 J6.2@1102.36,-442.91
SP-: J6.1 L6.2 TP15.1 | length 547.7
  Top Layer w30: L6.2@774.45,-560 774.45,-562.95 784.06,-572.56 787.01,-572.56 805.45,-591 1092.07,-591 J6.1@1102.36,-580.71
  Bottom Layer w30: TP15.1@905.51,-590.55 1092.52,-590.55 J6.1@1102.36,-580.71
SWDCLK: J7.4 J9.4 TP22.1 U5.AA24 | length 1734.4
  Top Layer w6: U5.AA24@441.42,127.95 441.42,224.42 513,296 v1(557,296) ; J7.4@765,595 727,557 652,557 619,524 619,436 652,403 v1(828,403) ; v1(999,537) 1002,540 J9.4@1070,540
  Bottom Layer w6: v1(557,296) 557,327 633,403 v1(828,403) 827.39,402.39 827.39,367.59 820.45,360.65 TP22.1@826.77,354.33 ; TP22.1@825,350 898,277 1039,277 1070,308 1070,466 v1(999,537)
SWDIO: J7.2 J9.2 TP21.1 U5.AC24 | length 1277.1
  Top Layer w6: U5.AC24@461.1,127.95 461.1,208.1 v1(524,271) ; J7.2@765,545 765,540.99 753,528.99 753,460 790,423 v1@964.75,423 ; v1(964.75,419.5) 964.75,425.25 964.75,457.75 997,490 J9.2@1070,490
  Bottom Layer w6: v1(524,271) 524,341 613,430 954.25,430 v1(964.75,419.5) 986.75,397.5 TP21.1@986.75,346.5
USB-DEVICE-D_N: J8.A7 J8.B7 TP4.1 U5.AD4 U15.3 | length 1244
  Top Layer w5.14: U5.AD4@480.79,-88.58 481.88,-87.49 488.51,-87.49 492.86,-83.14 616.14,-83.14 790.61,-257.61 797.14,-264.14 968.61,-264.14 975.14,-257.61 1011.61,-221.14 1025.57,-207.18 v1(1025.57,7) ; U15.3@1134.87,35 1134.87,33.03 1158,9.91 v1(1158,9.59) 1158.13,9.71 1213.06,9.71 J8.A7@1213.19,9.84 1261.16,9.84 1280.84,-9.84 J8.B7@1330.12,-9.84
  Bottom Layer w5.14: v1@1028.28,4.29 v1(1025.57,7) 1065.11,7 1097.48,39.37 TP4.1@1102.36,39.37 ; TP4.1@1097.55,34.56 TP4.1@1102.36,39.37 ; v1(1158,9.59) 1156.09,11.5 1140.29,11.5 1112.42,39.37 TP4.1@1102.36,39.37
USB-DEVICE-D_P: J8.A6 J8.B6 TP3.1 U5.AD6 U15.2 | length 1363.7
  Top Layer w5.14: U5.AD6@480.79,-68.9 481.88,-69.99 489.99,-69.99 492,-72 620.75,-72 801.75,-253 964,-253 1007,-210 v1(1007,-20) ; U15.2@1123.66,-28.59 1125.63,-28.59 U15.2@1134.87,-37.83 ; U15.2@1134.87,-39.8 U15.2@1134.87,-37.83 ; v1(1255.71,-10.97) 1254.58,-9.84 J8.A6@1213.19,-9.84 1168.61,-9.84 1162.04,-16.41 v1(1158.01,-16.41) 1156.29,-16.41 U15.2@1134.87,-37.83 ; v1(1287.13,10.13) 1287.28,9.99 1329.97,9.99 J8.B6@1330.12,9.84
  Bottom Layer w5.14: v1(1007,-20) 1008.79,-18.21 1102,-18.21 ; TP3.1@1096.79,-73.16 TP3.1@1102.36,-78.74 1102.36,-18.57 1102,-18.21 ; v1@1154.21,-18.21 1102,-18.21 ; v1@1154.21,-16.41 v1(1158.01,-16.41) 1246.25,-16.41 1251.69,-10.97 v1(1255.71,-10.97) 1273.97,7.29 1284.29,7.29 v1(1287.13,10.13)
VDD: C1.2 C2.2 C3.2 C4.2 C6.2 C25.2 C28.2 J7.1 J9.1 L1.1 R11.1 R14.2 R38.2 TP17.1 U4.5 U5.A22 U5.AD14 U5.AD23 U5.B1 U5.W1 U10.5 U12.8 U13.8 | length 5876.9
  Top Layer w6: C1.2@167.72,-155 168.72,-156 197,-156 v1(200,-153) 225.05,-127.95 U5.B1@244.57,-127.95 ; v1(177,-437) 205.03,-437 211.89,-430.14 236.14,-430.14 263,-457 263,-559.52 231.34,-591.18 U10.5@231.34,-596.1 259.1,-596.1 v1(281,-618) ; v1(414,-191) 414.63,-191.63 C6.2@417,-191.63 ; C6.2@417,-191 421.73,-186.27 U5.W1@421.73,-127.95 ; U5.AD14@480.79,9.84 527.13,9.84 C4.2@527.28,10 527.28,8.43 537.07,-1.36 v1(537.07,-4.93) ; U5.AD23@480.79,108.27 524.55,108.27 C3.2@525.28,109 525.28,127.28 v1(526,128)
  Top Layer w10: R11.1@-460,-832.48 -459.48,-833 -434,-833 -433,-832 v1(-432,-832) ; U4.5@4.39,516.02 7.1,513.31 v1(28.99,513.31) ; C2.2@139.72,95 v1(177,95) 184,88 v3(225,88) 225,88.46 U5.A22@224.88,88.58 ; C6.2@417,-191.63 427.83,-191.63 439.56,-203.36 439.56,-213.02 v1(453.27,-226.73) 480.03,-253.5 L1.1@482,-253.5 ; v1(526,128) 526,168 538.52,180.52 R14.2@581,180.52 ; J7.1@815,545 815,539.32 825,529.32 v1(825,462) ; U12.8@855,-109.06 C25.2@855,-158.5 884.5,-158.5 v1(885,-158) ; U13.8@885.32,345 U13.8@893.19,345 ; v1(900,373) 900,351.81 U13.8@893.19,345 ; R38.2@1022.48,285 1022.48,287.95 979.13,331.3 975.24,331.3 963.5,343.03 C28.2@963.5,345 ; J9.1@1230,490 1230,449 1202,421 1014,421 965.84,372.84 965.84,347.34 C28.2@963.5,345 ; U13.8@893.19,345 C28.2@963.5,345
  PWR/SIG w10: v1(-432,-832) -432,-968 -405,-995 100,-995 281,-814 v1(281,-618) ; v1(177,95) 177,-130 v1(200,-153) 254,-207 398,-207 v1(414,-191) ; v1(526,128) 526,6.13 v1(537.07,-4.93) 539.77,-4.93 546.84,-12 710,-12 ; v1(825,462) 786,423 786,378 ; v1(885,-158) 885,-110 787,-12 710,-12 ; v1(900,373) 879,352 812,352 786,378 ; 710,-12 715,-7 715,332 761,378 786,378
  Bottom Layer w6: v1(177,-437) 151,-411 151,-202 v1(200,-153) ; TP17.1@236.22,-590.55 253.55,-590.55 v1(281,-618)
  Bottom Layer w10: v1(28.99,513.31) 177,365.3 v1(177,95) ; v1(453.27,-226.73) 495.77,-226.73 522.37,-253.33 789.67,-253.33 v1(885,-158)
pads on no net: D1.2 D2.2 D3.2 D6.2 D7.2 D9.2 D11.2 J1.2 J1.M2 J2.2 J2.M2 J3.M2 J4.M2 J5.q J6.q J7.6 J7.A J7.B J7.C J7.D J7.E J7.F J7.G J8. J8.A8 J8.B8 J9.6 J9.7 J9.8 J9.M M1.1 M2.1 M3.1 M4.1 U1.3 U3.1 U4.1 U5.H23 U8.3 U9.1 U10.1 U14.5 U14.6 U14.12 U14.13 X1.2 X1.4
copper on no net: | length 33.7
  Top Layer w10: -569,-1283 -569,-1271
  Top Layer w12: -188.6,514.71 -188.31,515 v1(-167,515)

## Polygon pours and split planes (outlines as drawn)
+VIN-PROTECT on Top Layer "NONET_L-01_P-001" (solid, remove dead copper, pour order 14): -475,-40 -475,75 -855,75 -855,335 -585,335 -585,290 -800,290 -800,175 -315,175 -315,-40
NetC5_1 on Top Layer "NONET_L-01_P-001" (solid, remove dead copper, pour order 17): -440,345 -440,455 -625,455 -625,535 -380,535 -380,345
NetC14_1 on Top Layer "NONET_L-01_P-001" (solid, remove dead copper, pour order 13): -726,780 -479,780 -479,1091 -726,1091
GND on GND1 "NONET_L-01_P-001" (solid, remove dead copper, pour order 12): -1725,-1700 -1725,2175 1925,2175 1925,-1700
GND on GND1 "NONET_L-01_P-001" (solid, remove dead copper, pour order 7): -1450,-1450 -1450,1450 1450,1450 1450,-1450
+5v0 on PWR/SIG "NONET_L-01_P-001" (solid, remove dead copper, pour order 16): -1470,-1435 -1470,1465 1430,1465 1430,-1435

## Keep-outs
Keep-Out Layer:
  lines w1: 1340,-1415 ccw(c1340,-1340) 1415,-1340 ; 1340,-1415 ccw(c1340,-1340) 1415,-1340 ; 1340,-1415 430,-1415 430,-1355 -145,-1355 -145,-1415 -1340,-1415 cw(c-1340,-1340) -1415,-1340 -1415,-790 -1355,-790 -1355,795 -1415,795 -1415,1340 cw(c-1340,1340) -1340,1415 -410,1415 -410,1355 410,1355 410,1415 1340,1415 cw(c1340,1340) 1415,1340 1415,-374.97 1354.49,-374.97 1354.49,-650 1415,-650 1415,-1340

## Silkscreen, mask and mechanical layers (free items; w line width, h text height)
Top Overlay:
  text "6" at -295,1040 h98.43 r180
  text "5" at -158,1040 h98.43 r180
  text "4" at -20,1040 h98.43 r180
  text "3" at 116,1040 h98.43 r180
  text "2" at 257,1040 h98.43 r180
  text "1" at 392,1040 h98.43 r180
  text "BTN/LED" at 392.81,936 h78.74 r180
  text "1" at -1027,767 h98.43 r270
  text "M12 FEMALE" at -923,767.05 h78.74 r270
  text "2" at -1029,628 h98.43 r270
  text "3" at -1028,490 h98.43 r270
  text "SWD" at 1416,474 h78.74 r90
  text "4" at -1025,349 h98.43 r270
  text "1" at -1031,196 h98.43 r270
  text "CHARGER" at -931,195.99 h78.74 r270
  text "2" at -1032,49 h98.43 r270
  text "3" at -1032,-97 h98.43 r270
  text "1" at -1026,-251 h98.43 r270
  text "M12 MALE" at -924,-250.9 h78.74 r270
  text "2" at -1026,-391 h98.43 r270
  text "2" at 1031,-474 h98.43 r90
  text "3" at -1024,-531 h98.43 r270
  text "SPKR" at 906.84,-639 h100 r90
  text "1" at 1033,-659 h98.43 r90
  text "4" at -1021,-677 h98.43 r270
  text "TAILLIGHT" at -120,-930 h100
  text "1" at -120,-1035 h98.43
  text "2" at 15,-1035 h98.43
  text "3" at 160,-1035 h98.43
  text "4" at 295,-1035 h98.43
  text "W" at 426.05,-1192.23 h150
  text "2025-05-27" at 428.02,-1300.84 h125
  text ".PCB_MIXDOWN" at 1047.66,-1393.49 h250
  text ".PCB_PART_NUMBER" at 66.51,-1416.7 h125
Bottom Solder:
  text "W" at -6209.55,-4003.01 h100
[8] Board Outline:
  lines w1: 1340,-1415 ccw(c1340,-1340) 1415,-1340 ; 1340,-1415 ccw(c1340,-1340) 1415,-1340 ; 1340,-1415 430,-1415 430,-1355 -145,-1355 -145,-1415 -1340,-1415 cw(c-1340,-1340) -1415,-1340 -1415,-790 -1355,-790 -1355,795 -1415,795 -1415,1340 cw(c-1340,1340) -1340,1415 -410,1415 -410,1355 410,1355 410,1415 1340,1415 cw(c1340,1340) 1415,1340 1415,-374.97 1414.49,-374.97 1354.49,-374.97 1354.49,-650 1355,-650 1415,-650 1415,-1340